# Altium PCB 800U R3N3_SENSOR_V1.4.PcbDoc
Units mm, origin at the board's own origin, x right, y up, seen from the top; angles counter-clockwise.
Board outline 152.4 x 101.6 mm, 2 copper layers (Top Layer, Bottom Layer); 17 components, 10 nets, 29 pads, 17 vias.
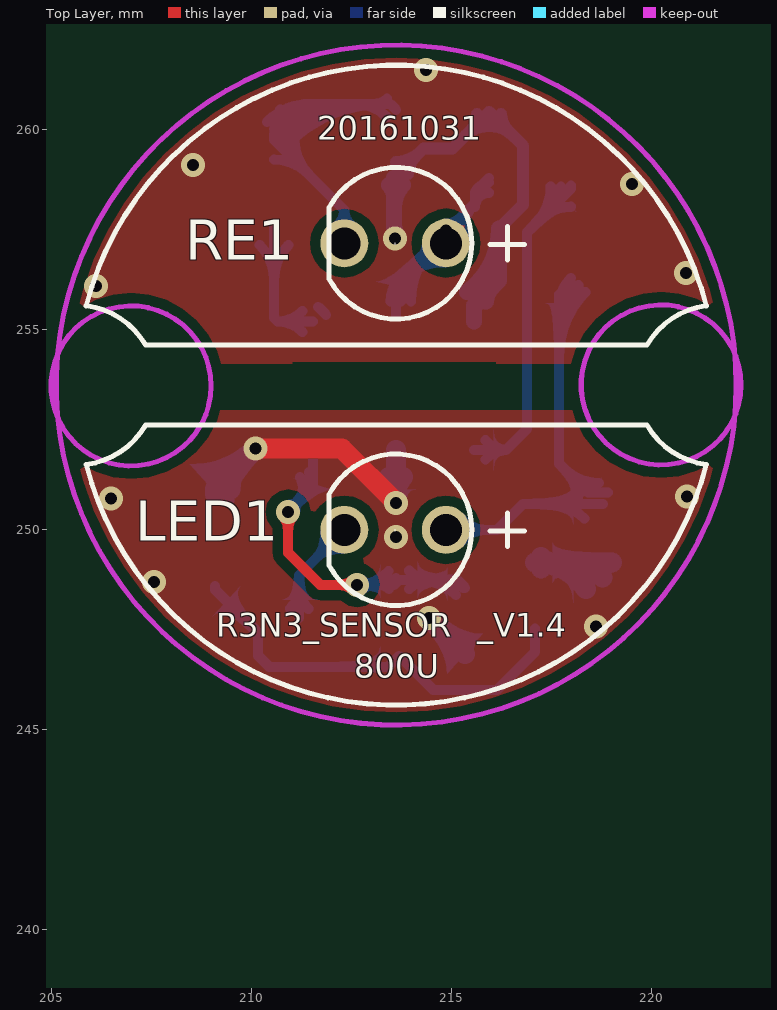
[diagram p0: Top Layer view]
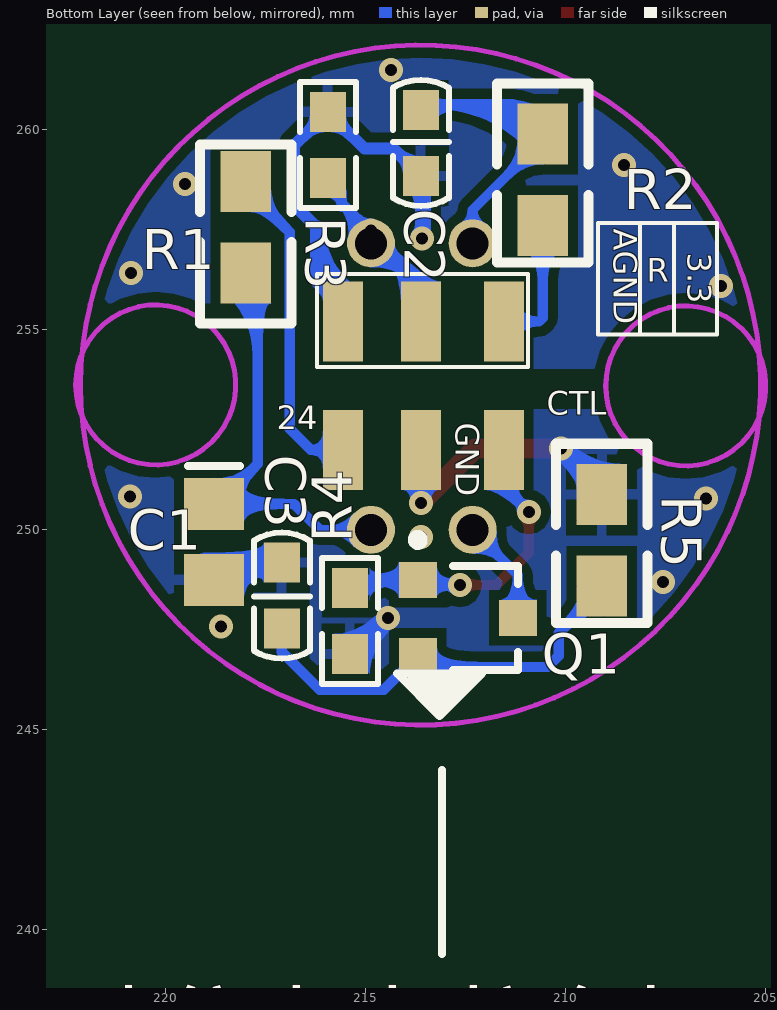
[diagram p1: Bottom Layer view, seen from below]

## Layer stack, top to bottom
Top Layer: signal copper 0.0356
Dielectric: dielectric 0.32, FR-4, Dk 4.8
Bottom Layer: signal copper 0.0356

## Board outline
162.425,214.025 314.825,214.025 314.825,315.625 162.425,315.625

## Design rules (kind name [scope] priority, off if disabled: settings)
Clearance [All] p1: gap=0.25
FabricationTestpoint [(IsPad And (OnTopLayer Or OnBottomLayer))] p1: side=3 testpointundercomponent=TRUE minsize=1.016 maxsize=2.54 preferedsize=1.524 minholesize=0 maxholesize=1.016 preferedholesize=0.813 testpointgrid=0.025 allowsidetop=TRUE allowsidebottom=TRUE usegrid=TRUE gridtolerance=0
PlaneConnect [Isvia] p1: planeconnectstyle=Relief reliefexpansion=0.508 reliefentries=4 reliefconductorwidth=0.254 reliefairgap=0.254
PolygonConnect [Isvia] p1: connectstyle=Direct reliefconductorwidth=0.254 reliefentries=4 polygonreliefangle="90 Angle" airgapwidth=0.254
RoutingVias [All] p1: holewidth=0.3 width=0.6 viastyle="Through Hole" minholewidth=0.3 minwidth=0.6 maxholewidth=0.3 maxwidth=0.6
SilkToSolderMaskClearance SilkscreenOverComponentPads [IsPad] p1: minsilkscreentomaskgap=0.254 clearancetoexposedcopper=TRUE
SolderMaskExpansion [All] p1: expansion=0.102
Width [All] p1: maxlimit=0.6 minlimit=0.254 preferedwidth=0.254 minimp=50.000000 maximp=50.000000 favimp=50.000000
25 further rules are at their usual default settings.

## Classes and differential pairs
component class "800U R3N3_TR": 3.3 24 C1 C2 C3 CTL GND LED1 Q1 R R1 R2 R3 R4 R5 RE1

## Components (designator, comment, footprint, x,y, rotation, side; value= is the part's Value field where it differs from the comment)
3.3 "" HOLE_SMD 211.55,255.21 r180 bottom (schematic designator 2)
24 "" HOLE_SMD 215.575,252 r180 bottom (schematic designator 1)
AGND "" HOLE_SMD 215.575,255.21 r180 bottom (schematic designator LEDCTL1)
C1 "105" C0805 218.8,249.7 r270 bottom
C2 "105" C0603 213.625,260.5 r270 bottom
C3 "102" C0603 217.1,247.53 r90 bottom
CTL "" HOLE_SMD 211.55,252 r180 bottom (schematic designator LEDCTL1)
GND "" HOLE_SMD 213.625,252 r180 bottom (schematic designator GND1)
LED1 "SIR67-21C" LED-2.54-3 213.6,250 r180 top
Q1 "MMBT5551" SOT-23 212.45,247.8 r270 bottom
R "" HOLE_SMD 213.625,255.21 r180 bottom (schematic designator LED_R1)
R1 "100" R0805 218,257.57 r90 bottom
R2 "100" R0805 210.575,258.75 r270 bottom
R3 "10K" R0603 215.95,260.45 r270 bottom
R4 "10K" R0603 215.4,246.9 r90 bottom
R5 "15" R0805 209.1,249.74 r270 bottom
RE1 "PD70-01C" LED-2.54-3 213.6,257.165 r180 top

## Footprints (in the part's own frame and the unit in brackets; to place one, negate y for a bottom-side part, rotate by r counter-clockwise, add the part's x,y. Pads: shape width x height; smd on the part's side, far side on the other; paste and mask are expansions set on the pad)
C0603 [mm]
  rect 1x0.9 smd: 1(0,0) 2(1.65,0)
  silkscreen extent -0.75,-0.7 2.4,0.7
C0805 [mm] "Chip Capacitor; Body 2.0 x"
  rect 1.3x1.5 smd: 1(-0.95,0) 2(0.95,0)
  silkscreen extent -1.9,-0.65 -1.9,0.65
HOLE_SMD [mm]
  rect 1x2 smd: 1(0,0)
LED-2.54-3 [mm]
  round 1.2 hole 0.8: 1(-1.27,0) 2(1.27,0)
  silkscreen extent -3.23,-1.89 1.65,1.89
R0603 [mm]
  rect 1x0.9 smd: 1(0,0) 2(1.65,0)
  silkscreen extent -0.75,-0.7 2.4,0.7
R0805 [mil]
  rect 60x50 smd: 1(-45,0) 2(45,0)
  silkscreen extent -95,-45 81,45
SOT-23 [mm] "SOT-23; 3 Leads; Body 3.0 x 2.6 mm"
  rect 0.9x0.95 smd: 1(-0.95,-1.25) 2(0.95,-1.25) 3(0,1.25)
  silkscreen extent -2.07,-1.38 1.3,1.25

## Part data
3.3 24 AGND CTL GND R: library part 焊
C1: library part Cap, "贴片电容"
C2 C3: library part Cap, "贴"
LED1: library part LED0, "贴"
Q1: library part NPN, "贴片NPN三极管"
R1 R2 R3 R4 R5: library part "Res Semi", "贴"
RE1: library part "Photo Sen", "贴"

## Via types
v1: diameter 0.6, hole 0.3, Top Layer to Bottom Layer, 17 vias

## Nets (pads, with @x,y where several pads share a name; then routed paths per layer and width w, separated by ;. In a path a pad name is that pad's centre, name@x,y a point inside that pad or via, vN(x,y) a via of type N, cw(c..) or ccw(c..) an arc to the next point about the centre after c; other vN are vias at no path point)
3.3V: 3.3.1 R2.2 | length 6.9
  Bottom Layer w0.254: R2.2@210.216,257.12 cw(c209.349,256.253) 210.575,256.253 cw(c211.801,256.253) R2.2@210.934,257.12 ; R2.2 210.575,255.3 210.665,255.21 ; 3.3.1@211.283,254.95 ccw(c210.665,254.347) 210.665,255.21 ; 3.3.1@211.283,255.47 cw(c210.665,256.073) 210.665,255.21 ; 3.3.1 210.665,255.21 ; 3.3.1@211.675,255.575 3.3.1@211.875,255.375
+24V: 24.1 R1.2 | length 11.8
  Bottom Layer w0.254: 24.1 216.375,252 ; 24.1@215.861,251.76 cw(c216.375,251.329) 216.375,252 ; 24.1@215.861,252.24 ccw(c216.375,252.671) 216.375,252 ; 217.1,257.64 ccw(c216.155,258.586) R1.2@217.492,258.586 ; 217.211,257.751 cw(c218,256.963) R1.2@218,258.078 ; R1.2@217.534,258.074 ccw(c217.022,258.586) R1.2@217.746,258.586 ; R1.2@218,258.613 218,258.54 216.9,257.44 216.9,252.525 216.375,252
AGND: AGND.1 C2.2 R3.1 | length 21.4
  Bottom Layer w0.3: C2.2 214.312,259.537 215.037,259.537 R3.1 216.8,259.6 216.8,258.134 216.2,257.534 ; C2.2@213.625,259.2 ccw(c213.625,260.045) 214.222,259.447 ; C2.2@213.925,258.9 cw(c214.529,258.9) 214.102,259.327 ; 215.353,259.853 cw(c215.95,259.255) 215.95,260.1 cw(c215.95,259.255) 216.547,259.853 ; 215.473,259.973 ccw(c215.046,260.4) R3.1@215.65,260.4 ; R3.1@216.25,260.4 ccw(c216.854,260.4) 216.427,259.973
  Bottom Layer w0.4: 213.575,257.592 ccw(c213.902,257.592) v1@213.671,257.361 ; 213.575,258.148 cw(c214.183,258.148) C2.2@213.788,258.61 ; 213.575,258.15 213.575,257.975 ; C2.2@213.575,258.8 213.575,257.975 ; v1(213.6,257.29) 213.575,257.315 213.575,257.975 ; AGND.1@215.398,255.952 ccw(c214.239,257.534) 216.2,257.534 216.2,256.235 ; AGND.1 215.575,255.61 216.2,256.235 ; AGND.1@215.596,256.009 ccw(c215.65,256.784) 216.2,256.235 ; AGND.1@215.634,255.629 ccw(c214.817,256.745) 216.2,256.745 ; AGND.1@215.875,255.71 cw(c216.358,255.71) AGND.1@216.016,256.051 ; C2.2@213.448,258.623 cw(c213.142,258.317) 213.575,258.317 ; C2.2@213.448,258.623 cw(c213.142,258.317) 213.575,258.317 ; C2.2@213.448,258.623 cw(c213.142,258.317) 213.575,258.317 ; 213.575,258.076 cw(c214.349,258.076) 213.802,258.623 ccw(c214.349,258.076) 213.575,258.076
  other v1: 206.125,256.1 220.875,256.42 219.525,258.65 208.55,259.125 214.375,261.5
GND: C1.2 C3.2 GND.1 R4.1 R5.1 | length 16.2
  Top Layer w0.5: v1@210.105,252.03 212.27,252.03 v1(213.625,250.675)
  Bottom Layer w0.5: R5.1 209.1,251.025 v1(210.115,252.04) ; R5.1@209.1,251.395 ccw(c209.1,252.288) 209.732,251.657 ; R5.1@209.485,251.01 cw(c210.451,251.01) 209.768,251.693 ; GND.1@213.448,251.323 cw(c213.021,250.896) 213.625,250.896 cw(c214.229,250.896) GND.1@213.802,251.323 ; v1(213.625,250.675) GND.1 ; v1(214.45,247.8) R4.1@215.35,246.9 ; 214.923,247.327 ccw(c215.35,247.754) R4.1@215.35,247.15 ; C3.2@217.241,249.039 cw(c217.583,248.697) 217.583,249.18 cw(c217.583,249.663) C3.2@217.241,249.321 ; C1.2@218.064,249.18 cw(c218.064,248.302) C1.2@218.782,248.808 ; C1.2@218.373,248.52 ccw(c217.1,247.623) C3.2 C1.2@219.025,249.18
  other v1: 218.625,247.59 207.575,248.7 213.625,249.825 206.5,250.78 220.9,250.84
LEDCTL: CTL.1 Q1.1 R4.2 | length 16
  Top Layer w0.254: v1@210.803,250.328 cw(c210.507,250.032) 210.925,250.032 cw(c211.343,250.032) v1@211.047,250.328 ; v1(210.925,250.45) 210.925,249.425 211.725,248.625 v1(212.65,248.625) ; v1@212.528,248.503 ccw(c212.232,248.207) 212.232,248.625 ccw(c212.232,249.043) v1@212.528,248.747
  Bottom Layer w0.254: v1(210.925,250.45) 211.55,251.075 CTL.1 ; v1@210.925,250.623 ccw(c210.925,251.041) 211.22,250.745 ccw(c211.516,250.45) v1@211.098,250.45 ; 211.138,250.663 ccw(c210.753,251.047) CTL.1@211.226,251.316 ; 211.373,250.898 ccw(c211.054,251.218) CTL.1@211.447,251.441 ; v1@212.772,248.503 cw(c213.068,248.207) 213.068,248.625 cw(c213.068,249.043) v1@212.772,248.747 ; 213.197,248.625 cw(c213.197,248.272) Q1.1@213.447,248.522 ; Q1.1@213.231,248.625 ccw(c213.231,249.161) Q1.1@213.624,248.797 ; Q1.1@213.438,248.969 cw(c212.65,249.698) v1(212.65,248.625) 213.575,248.625 Q1.1 215.15,248.75 R4.2@215.35,248.55 ; Q1.1@213.953,248.522 cw(c214.505,247.97) 214.505,248.75 cw(c214.505,249.53) Q1.1@213.953,248.978 ; 214.208,248.75 cw(c214.208,247.458) R4.2@215.122,248.372 ; 214.821,248.75 cw(c214.821,248.071) R4.2@215.301,248.551
NetC1_1: C1.1 LED1.1 R1.1 | length 18.4
  Bottom Layer w0.254: LED1.1 216.15,250 216.8,250.65 C1.1 ; 217.7,254.349 cw(c219.951,254.349) R1.1@218.359,255.941 ; 217.7,254.963 cw(c219.337,254.963) R1.1@218.18,256.12 ; 217.7,255.576 cw(c218.724,255.576) R1.1@218,256.3 ; C1.1@218.177,250.65 ccw(c216.914,250.65) 217.807,251.543 ccw(c218.7,252.436) C1.1@218.7,251.173 ; R1.1@218.225,256.007 217.827,256.007 217.7,255.88 217.7,251.65 218.42,250.93 C1.1@218.925,250.93 ; C1.1@218.33,250.28 ccw(c217.437,249.387) 217.437,250.65 ccw(c217.437,251.913) C1.1@218.33,251.02
NetC2_1: C2.1 R2.1 RE1.2 | length 20.6
  Bottom Layer w0.254: R2.1@210.395,260.199 cw(c211.484,259.111) 211.484,260.65 ; R2.1@210.575,259.258 cw(c210.575,258.069) 211.416,258.909 ; R2.1@210.575,260.02 cw(c212.097,258.498) 212.097,260.65 ; R2.1@210.729,260.504 ccw(c210.911,261.072) 211.332,260.65 ; R2.1@210.755,259.84 cw(c212.71,257.884) 212.71,260.65 ; R2.1@210.829,259.766 ccw(c211.48,259.766) R2.1@211.02,259.305 ; R2.1@210.934,259.66 cw(c213.323,257.271) C2.1@213.323,260.65 ; R2.1@211.083,259.766 ccw(c212.347,259.766) 211.453,258.872 ; R2.1@211.083,260.03 cw(c211.935,260.047) 211.332,260.65 ; RE1.2@212.089,257.572 ccw(c211.838,257.995) 212.33,257.995 ; RE1.2 212.33,257.995 ; RE1.2@212.571,257.572 cw(c212.822,257.995) 212.33,257.995 ; 212.604,260.65 cw(c212.604,259.529) C2.1@213.397,260.322 ; 213.087,260.65 ccw(c213.087,261.088) C2.1@213.397,260.778 ; C2.1 213.475,260.65 211.332,260.65 ; 211.332,260.65 R2.1 210.575,259.75 212.33,257.995
NetC3_1: C3.1 Q1.2 R5.2 | length 10.7
  Bottom Layer w0.254: R5.2 209.1,248.5 210.175,247.425 210.175,246.85 210.45,246.575 213.425,246.575 Q1.2 214.55,246 216.15,246 217.1,246.95 C3.1
NetLED1_2: LED1.2 Q1.3 | length 3.9
  Bottom Layer w0.254: Q1.3@210.972,248.028 ccw(c210.42,248.58) 211.2,248.58 ccw(c211.98,248.58) Q1.3@211.428,248.028 ; Q1.3 211.2,248.87 LED1.2
NetLED_R1_1: R3.2 R.1 RE1.1 | length 15.1
  Bottom Layer w0.254: R.1@213.49,255.71 cw(c214.347,255.71) 213.741,256.316 ; R.1@213.585,256.16 cw(c214.87,254.874) RE1.1@214.87,256.692 ; R.1@213.625,255.375 213.625,256.2 215.595,258.17 ; R.1@213.744,255.71 cw(c215.214,255.71) 214.175,256.75 ; R.1@213.998,255.71 cw(c216.081,255.71) RE1.1@214.608,257.183 ; 214.018,256.593 cw(c214.87,255.741) RE1.1@214.87,256.946 ; 214.261,256.836 ccw(c213.931,257.165) RE1.1@214.397,257.165 ; RE1.1@214.558,257.133 ccw(c214.212,257.48) RE1.1@214.702,257.48 ; RE1.1@214.631,257.206 cw(c214.875,256.962) RE1.1@214.875,257.307 ; RE1.1@214.87,257.638 ccw(c214.87,258.104) 215.199,257.774 ; RE1.1@214.875,257.653 ccw(c214.875,258.143) 215.222,257.797 ; RE1.1@215.048,257.48 cw(c215.393,257.48) 215.149,257.724 ; RE1.1@215.084,257.212 cw(c215.75,257.36) 215.268,257.843 ; RE1.1@215.332,257.267 cw(c216.286,257.479) 215.595,258.17 ; 215.595,258.07 cw(c215.952,258.07) R3.2@215.951,258.427 ; R3.2@215.595,258.325 cw(c215.951,258.325) R3.2@215.95,258.681 ; R3.2 215.595,258.445 215.595,258.17
  other v1: 214.875,257.48

## Polygon pours and split planes (outlines as drawn)
GND on Top Layer "T" (solid, remove dead copper, pour order 8): 205.175,252.99 222.175,252.99 222.175,245.14 205.345,245.14 205.225,245.26 205.195,245.23 205.175,245.23
AGND on Top Layer "Mechanical 1-No Net" (solid, remove dead copper, pour order 1000): 205,262.175 222.1,262.175 222.125,262.15 222.125,254.15 205.05,254.15 205.025,254.175
GND on Bottom Layer "B" (solid, remove dead copper, pour order 6): 205,253.02 222.525,253.02 222.525,245.045 222.5,245.02 205.065,245.02 205.025,244.98
AGND on Bottom Layer "Mechanical 1-No Net" (solid, remove dead copper, pour order 1001): 205.2,261.95 222.125,261.95 222.15,261.975 222.15,254.1 222.225,254.025 205.3,254.025 205.25,253.975

## Keep-outs
Keep-Out Layer:
  circle w0.127: c207,253.6 r2
  circle w0.127: c220.25,253.625 r2
  circle w0.127: c213.629,253.619 r8.5

## Other copper
Top Layer:
  pour cut-out: 211.025,254.2 216.125,254.2 216.125,253 211.025,253
Bottom Layer:
  pour cut-out: 218.268,257.872 218.885,257.872 218.885,257.25 218.325,257.25 218.325,257.815
  pour cut-out: 216.079,256.2 216.75,256.2 216.75,255.85 216.725,255.825 216.075,255.825 216.075,256.204
  pour cut-out: 212.675,253.26 214.4,253.26 214.925,253.26 214.85,250.94 214.4,250.94 212.671,250.94 212.611,251 212.275,251 212.275,252.125 212.275,253.26
  pour cut-out: 218.175,255.66 222.105,255.66 222.125,255.68 222.125,251.625 222.15,251.6 218.195,251.6 218.175,251.58
  pour cut-out: 214.3,256.24 216.31,256.24 216.34,256.21 216.34,254.18 214.285,254.18 214.275,254.17
  pour cut-out: 211.025,254.2 216.125,254.2 216.125,253 211.025,253

## Silkscreen, mask and mechanical layers (free items; w line width, h text height)
Top Overlay:
  lines w0.127: 205.879,251.635 ccw(c213.629,253.619) 221.379,251.635 cw(c221.629,253.619) 219.896,252.621 207.362,252.621 cw(c205.629,253.619) 205.879,251.635 ; 205.879,255.603 cw(c213.629,253.619) 221.379,255.603 ccw(c221.629,253.619) 219.896,254.617 207.362,254.617 ccw(c205.629,253.619) 205.879,255.603
  text "20161031" at 211.65,259.55 h1
  text "R3N3_SENSOR" at 209.125,247.125 h1
  text "_V1.4" at 215.65,247.125 h1
  text "800U" at 212.575,246.1 h1
Bottom Overlay:
  lines w0.1: 207.3,254.955 207.3,257.675 ; 208.15,254.905 208.15,257.625 ; 206.225,254.88 209.2,254.88 209.2,257.67 206.225,257.67 206.225,254.88 ; 210.95,254.07 216.225,254.07 216.225,256.4 210.95,256.4 210.95,254.07
  lines w0.2: 212.775,246.37 213.447,245.697 ; 213.035,246.39 213.552,245.872 ; 213.1,239.4 213.1,244 ; 213.225,246.31 213.611,245.921 ; 213.254,245.45 212.294,246.41 214.214,246.41 213.154,245.35 212.094,246.41 212.494,246.41 213.342,245.562 ; 213.3,246.38 213.725,245.96 ; 213.57,246.345 213.832,246.082 ; 213.736,246.404 213.95,246.18
  text "对应外壳卡位标志" at 205.975,236.1 h3
Mechanical 1:
  circle w0.127: c213.629,253.619 r8.5
  circle w0.127: c220.25,253.625 r1.2
  circle w0.127: c207,253.6 r1.2
  lines w0.2: 210.775,253 210.775,254.2 216.35,254.2 216.35,253 210.775,253
Mechanical 3:
  lines w0.1: 205.1,253.6 222.129,253.6
  lines w0.127: 209.898,259.72 217.398,259.72 ; 209.987,259.723 ccw(c209.987,259.134) 209.398,259.134 209.398,254.72 ccw(c209.898,254.72) 209.898,254.22 217.398,254.22 ccw(c217.398,254.72) 217.898,254.72 217.898,259.22 ; 217.309,259.727 cw(c217.309,259.138) 217.898,259.138 ; 209.398,247.92 ccw(c209.898,247.92) 209.898,247.42 217.398,247.42 ccw(c217.398,247.92) 217.898,247.92 217.898,252.42 ccw(c217.398,252.42) 217.398,252.92 209.898,252.92 ccw(c209.898,252.42) 209.398,252.42 209.398,247.92
  lines w0.2: 213.625,245.45 213.625,261.5